# Altium PCB PAY-IF_R100.PcbDoc (part 4 of 5)
Units mm, origin at the board's own origin, x right, y up, seen from the top; angles counter-clockwise.
Board outline 93 x 90 mm, 6 copper layers (Top Layer, L2_GND, L3_PWR, L4_SIG, L5_GND, Bottom Layer), stack 1.598 mm thick; 271 components, 237 nets, 1362 pads, 661 vias.
Unrouted connection lines stored in the file: 5.
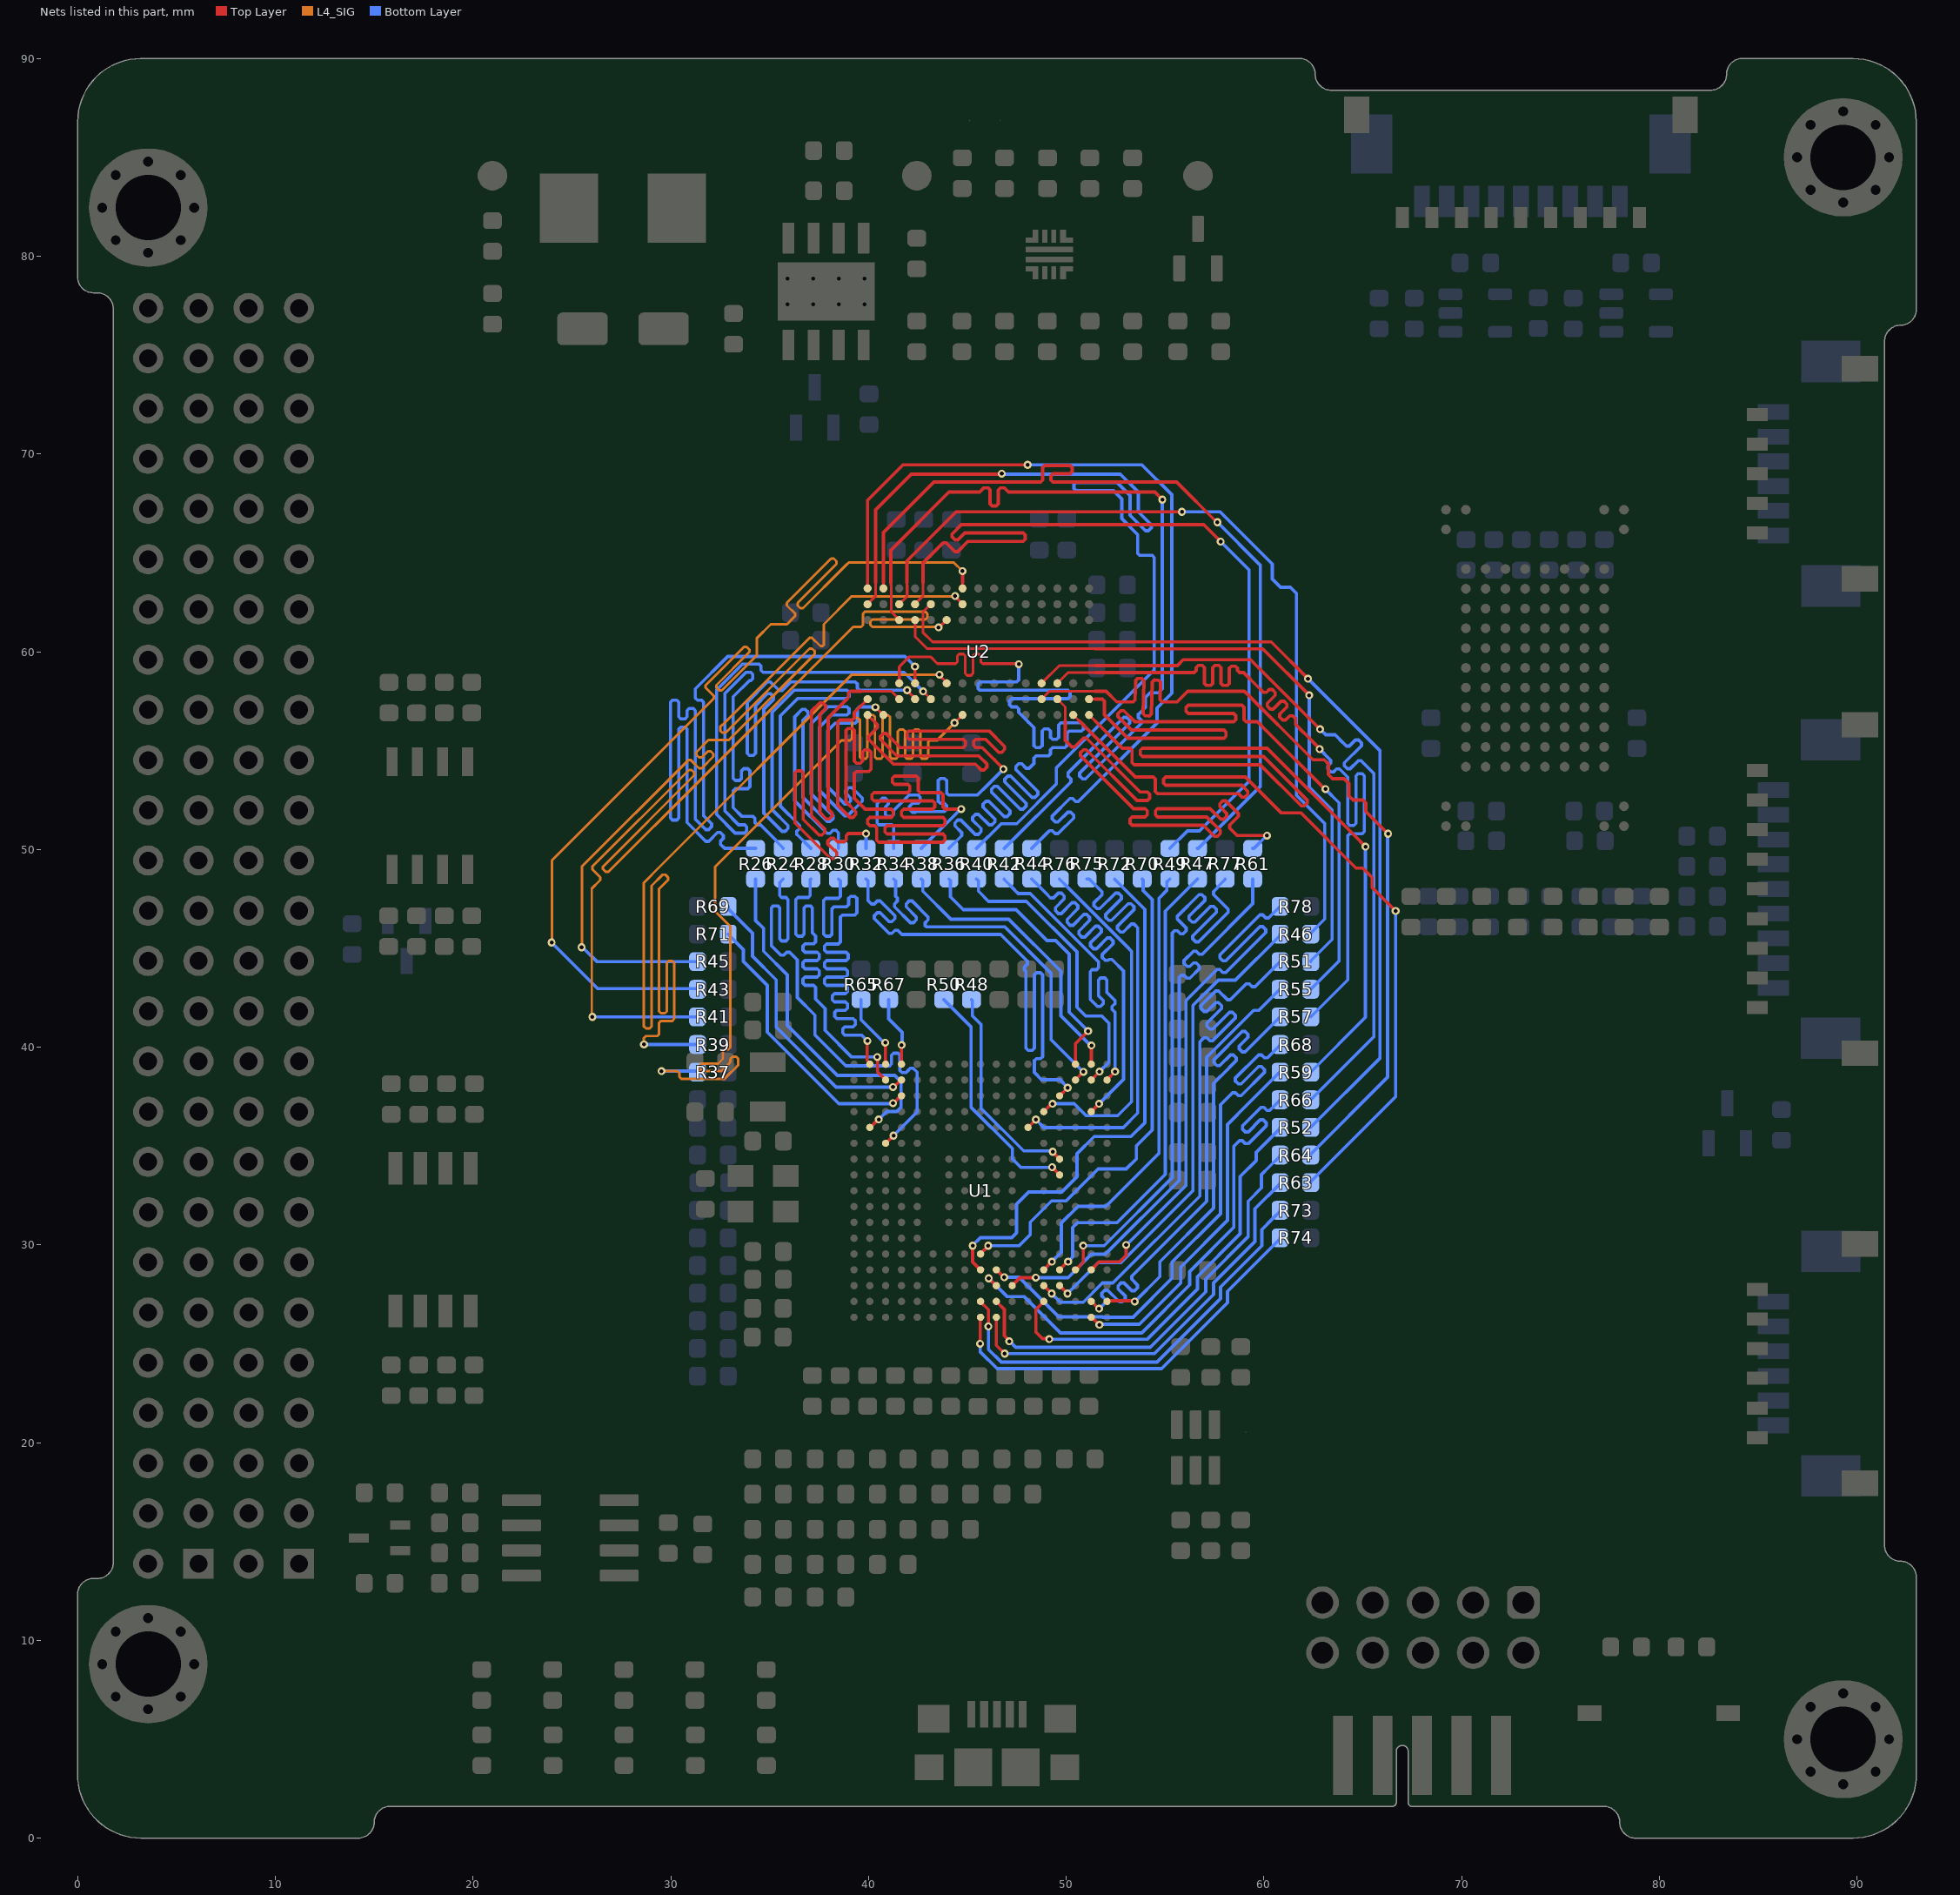
[diagram p8: the nets of this part, all layers, seen from the top]

## Via types
v1: diameter 0.4, hole 0.2, Top Layer to Bottom Layer, tented both sides, 661 vias

## Nets (pads, with @x,y where several pads share a name; then routed paths per layer and width w, separated by ;. In a path a pad name is that pad's centre, name@x,y a point inside that pad or via, vN(x,y) a via of type N, cw(c..) or ccw(c..) an arc to the next point about the centre after c; other vN are vias at no path point) (continued)
SDRAM_B_D9: R66.1 U2.M3 | length 40
  Top Layer w0.14: U2.M3@48.757,58.401 49.654,59.298 51.457,59.298
  Top Layer w0.165: 51.457,59.298 55.627,59.298 55.923,59.594 59.329,59.594 v1(62.845,56.078)
  Bottom Layer w0.165: R66.1@62.37,37.338 65.563,40.531 65.563,53.838 64.976,54.426 64.917,54.484 64.769,54.484 64.369,54.084 64.221,54.084 64.072,54.232 64.072,54.38 64.932,55.24 64.932,55.388 64.784,55.536 64.635,55.536 64.325,55.225 64.176,55.225 63.864,55.537 63.806,55.596 63.608,55.794 63.13,55.794 v1(62.845,56.078)
SDRAM_B_D10: R64.1 U2.M2 | length 45.5
  Top Layer w0.135: U2.M2@48.757,57.601 49.154,57.999 51.457,57.999
  Top Layer w0.165: 51.457,57.999 52.02,57.999 52.56,57.459 53.299,57.459 53.381,57.459 53.489,57.561 53.517,58.55 53.625,58.651 53.834,58.645 53.936,58.538 53.888,56.863 53.99,56.756 54.199,56.75 54.307,56.851 54.353,58.468 54.461,58.569 54.67,58.563 54.772,58.456 54.747,57.567 54.848,57.459 55.605,57.459 56.146,58 59.013,58 62.482,54.531 63.053,54.531 63.264,54.32 63.264,53.786 63.472,53.578 64.061,53.578 64.302,53.337 64.302,52.712 64.513,52.501 65.017,52.501 65.159,52.359 65.159,51.919 v1(66.285,50.792)
  Bottom Layer w0.165: R64.1@62.37,34.544 62.37,34.594 66.257,38.481 66.257,50.765 v1(66.285,50.792)
SDRAM_B_D11: R63.1 U2.P1 | length 46.2
  Top Layer w0.14: U2.P1@50.357,56.801 50.657,56.501
  Top Layer w0.165: 53.497,53.661 54.324,53.661 54.407,53.661 54.511,53.556 54.511,52.928 54.616,52.823 58.712,52.823 58.889,52.646 59.038,52.646 59.186,52.794 59.186,52.942 58.886,53.242 55.035,53.242 54.93,53.347 54.93,53.556 55.035,53.661 59.06,53.661 60.866,51.855 61.739,51.855 61.868,51.855 64.666,49.057 65.004,49.057 65.473,48.587 65.473,48.081 v1(66.666,46.889)
  Top Layer w0.166: 50.657,56.501 53.497,53.661
  Bottom Layer w0.165: R63.1@62.37,33.147 62.37,33.197 66.666,37.493 v1(66.666,46.889)
SDRAM_B_D12: R61.1 U2.N2 | length 37.7
  Top Layer w0.135: U2.N2@49.557,57.601 49.954,57.204 49.954,56.501
  Top Layer w0.165: 49.953,55.955 49.953,55.665 49.953,55.515 50.28,55.188 50.428,55.188 50.873,55.632 51.021,55.632 53.753,52.901 54.118,52.901 54.223,52.796 54.223,52.586 54.118,52.482 53.579,52.482 51.021,55.04 50.873,55.04 50.725,54.892 50.725,54.744 53.406,52.063 53.996,52.063 54.1,51.958 54.1,51.748 53.996,51.644 53.337,51.644 53.232,51.539 53.232,51.329 53.337,51.225 56.937,51.225 57.501,50.661 57.649,50.661 57.797,50.809 57.797,50.957 57.111,51.644 54.624,51.644 54.519,51.748 54.519,51.958 54.624,52.063 57.284,52.063 57.822,51.525 57.97,51.525 58.118,51.673 58.118,51.822 57.777,52.163 57.777,52.311 57.925,52.459 58.073,52.459 58.71,51.822 58.71,51.673 58.266,51.229 58.266,51.081 58.324,51.023 58.644,50.703 v1(60.159,50.703) ; 49.954,55.956 49.954,56.501
  Bottom Layer w0.165: R61.1@59.436,50.051 59.496,50.051 60.148,50.703 v1(60.159,50.703)
SDRAM_B_D13: R59.1 U2.R1 | length 49.2
  Top Layer w0.14: U2.R1@51.157,56.801 51.457,56.501
  Top Layer w0.165: 51.457,56.501 52.84,55.118 53.146,55.118 53.228,55.118 53.333,55.013 53.333,54.385 53.438,54.28 59.816,54.28 61.897,52.2 62.045,52.2 62.193,52.348 62.193,52.496 59.99,54.699 53.857,54.699 53.752,54.804 53.752,55.013 53.857,55.118 60.164,55.118 64.579,50.703 v1(65.14,50.141)
  Bottom Layer w0.165: R59.1@62.37,38.735 65.14,41.505 v1(65.14,50.141)
SDRAM_B_D14: R57.1 U2.N3 | length 43.8
  Top Layer w0.14: U2.N3@49.557,58.401 50.1,58.944 51.457,58.944
  Top Layer w0.165: 51.457,58.944 51.93,58.944 56.388,58.944 56.471,58.944 56.575,59.049 56.575,59.199 56.68,59.304 56.89,59.304 56.994,59.199 56.994,58.395 57.099,58.29 57.309,58.29 57.413,58.395 57.413,59.199 57.518,59.304 57.728,59.304 57.832,59.199 57.832,58.395 57.937,58.29 58.147,58.29 58.251,58.395 58.251,59.162 58.356,59.267 58.566,59.267 58.67,59.162 58.67,59.049 58.775,58.944 58.977,58.944 59.711,58.211 59.921,58 59.98,57.942 60.128,57.942 60.275,58.09 60.424,58.09 60.572,57.941 60.572,57.793 60.175,57.397 60.175,57.249 60.323,57.1 60.471,57.1 60.868,57.497 61.016,57.497 61.164,57.349 61.164,57.201 60.804,56.841 60.804,56.692 60.952,56.544 61.1,56.544 61.313,56.757 61.461,56.757 61.609,56.609 61.609,56.461 61.609,56.313 61.992,55.93 62.05,55.872 62.822,55.1 v1(62.822,55.073)
  Bottom Layer w0.165: R57.1@62.37,41.529 64.242,43.401 64.242,50.19 64.242,50.692 64.347,50.797 64.976,50.797 65.08,50.901 65.08,53.721 64.976,53.826 64.766,53.826 64.661,53.721 64.661,51.32 64.557,51.216 64.347,51.216 64.242,51.32 64.242,53.652 63.824,54.07 63.676,54.07 63.528,53.922 63.38,53.922 63.232,54.07 63.232,54.218 63.38,54.367 63.38,54.515 63.321,54.573 v1(62.822,55.073)
SDRAM_B_D15: R55.1 U2.R2 | length 43.9
  Top Layer w0.14: U2.R2@51.157,57.601 51.457,57.601
  Top Layer w0.165: 51.742,57.601 51.825,57.601 51.93,57.497 51.93,56.815 52.019,56.726 53.126,55.619 57.979,55.619 58.083,55.723 58.083,55.933 57.979,56.038 53.299,56.038 52.617,56.72 52.617,56.868 52.765,57.017 52.913,57.017 53.473,56.457 58.474,56.457 58.578,56.561 58.578,56.771 58.474,56.876 56.169,56.876 56.064,56.98 56.064,57.19 56.169,57.295 58.893,57.295 58.997,57.19 58.997,56.561 59.102,56.457 59.672,56.457 60.125,56.004 60.257,55.872 v1@63.107,53.022
  Top Layer w0.166: 51.457,57.601 51.742,57.601
  Bottom Layer w0.165: R55.1@62.37,42.926 63.806,44.362 63.806,52.357 v1(63.112,53.051)
SDRAM_B_D16: R52.1 U2.E8 | length 47.7
  Top Layer w0.138: 42.757,60.979 42.757,62.002
  Top Layer w0.14: 42.757,60.979 43.243,60.492 51.457,60.492 ; 42.757,62.002 U2.E8@43.157,62.401
  Top Layer w0.165: 51.457,60.492 60.37,60.492 v1(62.23,58.633)
  Bottom Layer w0.165: v1(62.23,58.633) 65.878,54.985 65.878,39.455 62.37,35.947 R52.1@62.37,35.941
SDRAM_B_D17: R51.1 U2.D7 | length 36.4
  Top Layer w0.14: U2.D7@42.357,61.601 42.357,60.772 42.981,60.148 51.457,60.148
  Top Layer w0.165: 59.946,60.148 v1(62.295,57.8)
  Top Layer w0.166: 51.457,60.148 59.946,60.148
  Bottom Layer w0.165: v1(62.295,57.8) 62.295,53.148 63.448,51.995 63.448,45.451 62.37,44.373 R51.1@62.37,44.323
SDRAM_B_D18: R49.1 U2.D8 | length 44.9
  Top Layer w0.14: U2.D8@42.357,62.401 42.757,62.801 42.757,63.5
  Top Layer w0.165: 42.757,63.5 42.757,64.484 43.725,65.453 43.783,65.511 43.932,65.511 44.376,65.067 44.524,65.067 45.041,65.583 47.829,65.583 47.933,65.688 47.933,65.897 47.829,66.002 44.867,66.002 44.524,65.659 44.376,65.659 44.228,65.807 44.228,65.955 44.693,66.421 48.185,66.421 48.373,66.421 56.962,66.421 v1(57.817,65.566)
  Bottom Layer w0.165: R49.1@55.245,50.051 56.134,50.94 56.742,50.94 59.248,53.446 59.248,64.134 v1(57.817,65.566)
SDRAM_B_D19: R47.1 U2.B9 | length 43.8
  Top Layer w0.14: U2.B9@40.757,63.201 40.757,63.5
  Top Layer w0.165: 40.757,63.5 40.757,66.03 43.307,68.58 48.62,68.58 48.703,68.58 48.807,68.685 48.807,69.313 48.912,69.418 50.2,69.418 50.305,69.313 50.305,69.104 50.2,68.999 49.331,68.999 49.226,68.894 49.226,68.685 49.331,68.58 53.098,68.58 55.586,68.58 57.619,66.547 v1(57.652,66.547)
  Bottom Layer w0.165: R47.1@56.642,50.051 56.692,50.051 59.817,53.176 59.817,64.382 v1(57.652,66.547)
SDRAM_B_D20: R46.1 U2.C8 | length 43.4
  Top Layer w0.14: U2.C8@41.562,62.401 41.957,62.796 41.957,63.367 41.942,63.382 41.942,63.5
  Top Layer w0.165: 41.942,63.5 41.942,64.589 44.427,67.075 v1(55.859,67.075)
  Bottom Layer w0.165: v1(55.859,67.075) 57.784,67.075 60.423,64.435 60.423,63.679 60.841,63.261 61.337,63.261 61.65,62.948 61.65,52.738 63.08,51.308 63.08,48.553 63.08,46.48 62.37,45.77 R46.1@62.37,45.72
SDRAM_B_D21: R44.1 U2.A9 | length 45
  Top Layer w0.14: U2.A9@39.957,63.201 39.957,63.5
  Top Layer w0.165: 39.957,63.5 39.957,67.663 41.746,69.452 v1(48.049,69.452)
  Bottom Layer w0.165: v1(48.049,69.452) 53.83,69.452 55.344,67.938 55.344,57.899 54.598,57.153 54.598,56.397 50.685,52.483 50.626,52.425 50.478,52.425 50.33,52.573 50.182,52.573 49.297,51.688 49.297,51.54 49.445,51.392 49.593,51.392 50.084,51.882 50.232,51.882 50.38,51.734 50.38,51.586 49.593,50.799 49.445,50.799 49.297,50.948 49.149,50.948 49.091,50.889 48.26,50.059 R44.1@48.26,50.051
SDRAM_B_D22: R42.1 U2.C7 | length 50.5
  Top Layer w0.14: 41.127,63.5 41.127,63.397 41.157,63.367 41.157,62.001 U2.C7@41.557,61.601
  Top Layer w0.165: 41.127,63.5 41.127,65.13 44.069,68.072 45.543,68.072 45.626,68.072 45.731,68.177 45.731,68.185 45.835,68.29 46.045,68.29 46.15,68.185 46.15,67.481 46.254,67.376 46.464,67.376 46.569,67.481 46.569,68.177 46.673,68.282 46.883,68.282 46.988,68.177 ; 46.988,68.177 47.092,68.072 48.233,68.072 54.483,68.072 v1(54.864,67.691)
  Bottom Layer w0.165: R42.1@46.863,50.051 46.876,50.051 50.182,53.357 50.24,53.415 50.24,53.563 50.092,53.712 50.092,53.86 52.912,56.68 53.06,56.68 53.209,56.532 53.209,56.384 50.685,53.86 50.685,53.712 50.833,53.563 50.981,53.563 53.801,56.384 53.801,56.532 53.653,56.68 53.653,56.828 53.711,56.886 54.011,57.186 54.011,57.696 54.238,57.923 54.666,57.923 54.864,58.121 54.864,62.918 v1(54.864,67.691)
SDRAM_B_D23: R40.1 U2.A8 | length 52.8
  Top Layer w0.14: U2.A8@39.957,62.401 40.358,62.802 40.358,63.035 40.357,63.036 40.357,63.367 40.358,63.368 40.358,63.5
  Top Layer w0.165: 40.358,63.5 40.358,67.178 42.162,68.982 46.719,68.982 v1(46.742,69.006)
  Bottom Layer w0.165: R40.1@45.466,50.051 46.714,51.299 47.499,51.299 49.507,53.308 49.507,54.126 54.455,59.073 54.455,64.685 54.455,64.768 54.35,64.872 53.722,64.872 53.617,64.977 53.617,65.921 52.81,66.728 52.81,67.727 52.393,68.144 50.499,68.144 50.394,68.249 50.394,68.458 50.499,68.563 52.566,68.563 53.229,67.9 53.229,66.901 54.013,66.117 54.161,66.117 54.309,66.265 54.309,66.413 53.648,67.075 53.648,68.074 52.74,68.982 47.117,68.982 46.766,68.982 v1(46.742,69.006)
SDRAM_B_D24: R38.1 U2.A2 | length 53.4
  Top Layer w0.14: 39.624,57.269 U2.A2@39.957,57.601
  Top Layer w0.165: 39.624,57.269 39.287,56.932 39.287,56.729 39.287,56.646 39.183,56.542 38.554,56.542 38.449,56.437 38.449,52.234 39.064,51.62 39.212,51.62 39.36,51.768 39.36,51.916 38.868,52.408 38.868,56.018 38.973,56.123 39.183,56.123 39.287,56.018 39.287,54.465 39.392,54.36 39.602,54.36 39.706,54.465 39.706,54.933 39.811,55.037 40.021,55.037 40.125,54.933 40.125,54.046 40.021,53.941 39.392,53.941 39.287,53.837 39.287,52.581 39.832,52.037 41.151,52.037 41.255,51.932 41.255,51.723 41.151,51.618 40.065,51.618 39.96,51.513 39.96,51.304 40.065,51.199 40.313,51.199 40.417,51.094 40.417,50.466 40.522,50.361 43.769,50.361 43.874,50.466 43.874,50.675 43.769,50.78 40.941,50.78 40.836,50.885 40.836,51.094 40.941,51.199 43.769,51.199 43.874,51.304 43.874,51.513 43.769,51.618 41.779,51.618 41.674,51.723 41.674,51.932 41.779,52.037 43.246,52.037 43.35,52.142 43.35,52.351 43.246,52.456 40.283,52.456 40.179,52.561 40.179,52.77 40.283,52.875 41.989,52.875 42.093,52.98 42.093,53.189 41.989,53.294 41.316,53.294 41.211,53.399 41.211,53.608 41.316,53.713 42.408,53.713 42.512,53.608 42.512,52.98 42.617,52.875 43.665,52.875 43.769,52.77 43.769,52.142 43.874,52.037 43.957,52.037 v1(44.69,52.038) v1(44.69,52.038)
  Bottom Layer w0.165: R38.1@42.672,50.051 44.659,52.038 v1(44.69,52.038)
SDRAM_B_D25: R36.1 U2.C3 | length 52.6
  Top Layer w0.14: U2.C3@41.557,58.401 41.557,59.237 42.063,59.743 43.138,59.743 43.487,59.393 44.33,59.393 44.4,59.393 44.498,59.492 44.498,59.785 44.597,59.883 44.794,59.883 44.892,59.785 44.892,58.9 44.991,58.801 45.188,58.801 45.286,58.9 45.286,59.785 45.385,59.883 45.582,59.883 45.68,59.785 45.68,59.492 45.779,59.393 46.336,59.393 47.575,59.393 v1(47.604,59.365)
  Bottom Layer w0.165: R36.1@44.069,50.051 44.659,50.642 44.718,50.7 44.718,50.848 44.372,51.193 44.372,51.341 44.521,51.489 44.669,51.489 45.401,50.758 45.549,50.758 45.697,50.906 45.697,51.054 45.271,51.48 45.271,51.628 45.419,51.776 45.567,51.776 46.1,51.243 46.248,51.243 46.396,51.391 46.396,51.54 45.798,52.138 45.798,52.286 45.946,52.435 46.094,52.435 46.865,51.663 47.013,51.663 47.161,51.811 47.161,51.96 46.223,52.898 46.223,53.047 46.371,53.195 46.519,53.195 47.677,52.036 47.825,52.036 47.974,52.184 47.974,52.332 46.898,53.408 46.898,53.556 47.046,53.704 47.194,53.704 48.27,52.629 48.418,52.629 48.566,52.777 48.566,52.925 47.453,54.039 47.453,54.187 47.601,54.335 47.749,54.335 47.977,54.107 48.125,54.107 48.193,54.175 48.368,54.35 48.368,54.54 48.368,54.622 48.472,54.727 49.101,54.727 49.206,54.832 49.206,55.041 49.31,55.146 49.939,55.146 50.044,55.251 50.044,55.879 50.148,55.984 50.777,55.984 50.882,56.089 50.882,56.298 50.777,56.403 49.729,56.403 49.625,56.298 49.625,55.67 49.52,55.565 49.31,55.565 49.206,55.67 49.206,55.989 49.101,56.093 48.891,56.093 48.787,55.989 48.787,55.251 48.682,55.146 48.472,55.146 48.368,55.251 48.368,56.164 48.163,56.369 48.089,56.443 48.031,56.501 47.604,56.928 47.604,57.024 47.604,57.106 47.5,57.211 47.247,57.211 47.142,57.316 47.142,57.525 47.247,57.63 50.095,57.63 50.199,57.735 50.199,57.944 50.095,58.049 45.643,58.049 45.538,58.154 45.538,58.363 45.643,58.468 47.5,58.468 47.604,58.573 47.604,58.985 v1(47.604,59.365)
SDRAM_B_D26: R34.1 U2.A1 | length 48.5
  Top Layer w0.165: U2.A1@39.957,56.801 40.391,56.367 40.449,56.309 40.449,56.161 40.005,55.716 40.005,55.568 41.258,54.315 45.409,54.315 45.702,54.022 45.85,54.022 45.998,54.17 45.998,54.318 45.582,54.734 41.432,54.734 40.598,55.568 40.598,55.716 40.746,55.864 40.894,55.864 41.606,55.153 44.8,55.153 44.905,55.257 44.905,55.467 44.8,55.572 42.057,55.572 41.953,55.676 41.953,55.886 42.057,55.991 46.103,55.991 46.887,55.207 46.887,55.059 46.738,54.911 46.59,54.911 45.93,55.572 45.428,55.572 45.324,55.467 45.324,55.257 45.428,55.153 45.756,55.153 46.22,54.689 46.294,54.615 46.368,54.54 46.426,54.482 46.826,54.083 v1(46.826,54.06)
  Bottom Layer w0.165: R34.1@41.275,50.051 41.275,51.054 41.275,51.136 41.17,51.241 40.542,51.241 40.437,51.346 40.437,52.314 40.706,52.583 40.854,52.583 41.002,52.435 41.002,52.286 40.856,52.141 40.856,51.765 40.961,51.66 41.17,51.66 41.275,51.765 41.275,51.967 42.058,52.75 42.514,52.75 42.619,52.645 42.619,52.436 42.514,52.331 42.231,52.331 42.08,52.179 42.08,52.031 42.228,51.883 42.376,51.883 42.405,51.912 43.849,51.912 43.953,52.017 43.953,52.226 43.849,52.331 43.639,52.331 43.534,52.436 43.534,53.483 43.639,53.588 43.849,53.588 43.953,53.483 43.953,52.855 44.058,52.75 45.516,52.75 46.038,53.273 46.171,53.405 v1(46.826,54.06)
SDRAM_B_D27: R32.1 U2.C2 | length 37.1
  Top Layer w0.14: 39.624,58 39.79,58 39.791,58.001 40.922,58.001 40.923,58 41.158,58 U2.C2@41.557,57.601
  Top Layer w0.165: 39.172,58.01 39.089,58.01 38.984,57.905 38.984,57.682 38.883,57.582 37.959,56.657 37.959,52.041 38.164,51.837 38.164,51.689 38.016,51.541 37.867,51.541 37.54,51.868 37.54,56.831 37.829,57.12 37.829,57.268 37.681,57.416 37.533,57.416 37.121,57.004 37.121,51.694 37.794,51.021 37.794,50.873 37.646,50.725 37.498,50.725 36.702,51.521 36.702,53.871 36.597,53.976 36.388,53.976 36.283,53.871 36.283,51.347 38.087,49.543 38.291,49.543 38.396,49.648 38.396,49.857 38.291,49.962 38.261,49.962 37.942,50.281 37.942,50.429 38.09,50.577 38.239,50.577 38.434,50.381 38.772,50.381 38.876,50.486 38.876,50.695 38.981,50.8 39.064,50.8 v1(39.878,50.8) ; 39.181,58 39.624,58
  Bottom Layer w0.165: R32.1@39.878,50.051 v1(39.878,50.8)
SDRAM_B_D28: R30.1 U2.B1 | length 41.3
  Top Layer w0.14: v1(40.35,57.187) 40.361,57.187 40.746,56.801 U2.B1@40.757,56.801
  Bottom Layer w0.165: R30.1@38.481,50.051 38.481,50.842 38.416,50.908 38.357,50.966 38.209,50.966 38.061,50.818 37.913,50.818 36.271,52.46 36.271,56.706 36.65,57.085 36.798,57.085 36.946,56.936 36.946,56.788 36.69,56.532 36.69,52.634 37.913,51.41 38.061,51.41 38.209,51.559 38.209,51.707 37.109,52.807 37.109,56.358 37.969,57.218 38.913,57.218 39.018,57.114 39.018,56.904 38.913,56.799 38.142,56.799 37.528,56.185 37.528,52.981 38.802,51.707 38.95,51.707 39.69,52.447 39.69,52.596 39.158,53.128 39.009,53.128 38.861,52.98 38.861,52.832 39.098,52.596 39.098,52.447 38.95,52.299 38.802,52.299 37.947,53.154 37.947,56.011 38.316,56.38 39.332,56.38 39.437,56.485 39.437,57.105 39.541,57.21 39.624,57.21 40.327,57.21 v1(40.35,57.187)
SDRAM_B_D29: R28.1 U2.D2 | length 46.4
  Top Layer w0.14: v1(41.957,58.054) 41.957,58.028 42.357,57.628 U2.D2@42.357,57.601
  Bottom Layer w0.165: R28.1@37.079,50.056 36.43,50.705 36.372,50.763 36.372,50.912 36.52,51.06 36.52,51.208 35.542,52.185 35.542,56.756 36.421,57.635 38.913,57.635 39.018,57.74 39.018,57.949 38.913,58.054 36.247,58.054 35.123,56.93 35.123,52.012 35.927,51.208 35.927,51.06 35.779,50.912 35.631,50.912 34.704,51.838 34.704,57.103 35.188,57.587 35.188,57.735 35.04,57.883 34.892,57.883 34.285,57.277 34.285,54.862 34.18,54.757 33.971,54.757 33.866,54.862 33.866,57.45 34.892,58.476 35.04,58.476 35.484,58.031 35.632,58.031 36.074,58.473 39.332,58.473 39.437,58.368 39.437,58.159 39.541,58.054 39.624,58.054 v1(41.957,58.054)
SDRAM_B_D30: R26.1 U2.D3 | length 50.4
  Top Layer w0.14: v1(42.354,59.251) v1(42.354,59.251) 42.355,58.403 U2.D3@42.357,58.401
  Bottom Layer w0.165: R26.1@34.29,50.051 32.984,50.051 32.728,50.051 32.513,50.265 32.513,50.413 32.662,50.562 32.662,50.71 32.513,50.858 32.365,50.858 31.921,50.413 31.773,50.413 30.825,51.361 30.825,56.082 30.72,56.187 30.51,56.187 30.406,56.082 30.406,51.59 30.301,51.485 30.091,51.485 29.987,51.59 29.987,57.443 30.091,57.548 30.301,57.548 30.406,57.443 30.406,56.711 30.51,56.606 30.72,56.606 30.825,56.711 30.825,57.024 30.929,57.129 31.139,57.129 31.244,57.024 31.244,51.535 31.773,51.006 31.921,51.006 32.069,51.154 32.069,51.302 31.663,51.708 31.663,57.443 31.558,57.548 31.348,57.548 31.244,57.653 31.244,57.735 31.244,58.12 32.88,59.756 41.849,59.756 v1(42.354,59.251)
SDRAM_B_D31: R24.1 U2.E2 | length 43.2
  Top Layer w0.14: v1(42.766,57.993) U2.E2@43.157,57.601
  Bottom Layer w0.165: R24.1@35.687,50.051 35.687,50.071 35.316,50.442 35.316,50.476 34.542,51.25 34.448,51.25 34.366,51.25 34.261,51.355 34.261,51.564 34.156,51.669 33.607,51.669 33.161,52.116 33.161,52.966 33.265,53.071 33.894,53.071 33.999,53.176 33.999,53.979 33.894,54.083 33.684,54.083 33.58,53.979 33.58,53.595 33.475,53.49 33.265,53.49 33.161,53.595 33.161,57.72 33.978,58.537 34.044,58.537 34.149,58.642 34.149,58.851 34.044,58.956 33.805,58.956 32.742,57.893 32.742,51.942 33.434,51.25 33.737,51.25 33.842,51.145 33.842,50.936 33.737,50.831 33.26,50.831 32.323,51.769 32.323,58.067 33.631,59.375 34.463,59.375 34.568,59.27 34.568,59.061 34.672,58.956 34.755,58.956 39.619,58.956 39.624,58.952 41.807,58.952 v1(42.766,57.993)
SDRAM_BA0: R50.1 U1.H14 | length 12.2
  Top Layer w0.165: v1(49.288,33.929) 49.288,33.924 49.669,33.543 U1.H14@49.669,33.539
  Bottom Layer w0.165: R50.1@43.815,42.405 45.186,41.034 45.186,36.971 47.28,34.877 47.28,34.351 47.712,33.918 v1@49.277,33.918
SDRAM_BA1: R48.1 U1.G14 | length 10.7
  Top Layer w0.165: v1(49.321,34.709) 49.321,34.698 49.669,34.35 U1.G14@49.669,34.339
  Bottom Layer w0.165: R48.1@45.212,42.405 45.258,42.359 45.258,41.588 45.698,41.148 45.698,36.905 47.851,34.752 49.278,34.752 v1(49.321,34.709)
SDRAM_D0: R78.2 U1.P16 | length 29.4
  Top Layer w0.165: U1.P16@51.269,28.739 51.672,29.142 52.704,29.142 53.032,29.47 53.032,29.997 v1(53.035,30)
  Bottom Layer w0.165: v1(53.035,30) 53.058,30 56.063,33.005 56.063,42.36 57.57,43.867 57.628,43.925 57.776,43.925 57.924,43.777 58.072,43.777 60.095,45.8 60.095,45.948 59.947,46.096 59.799,46.096 58.072,44.369 57.924,44.369 57.776,44.518 57.776,44.666 59.799,46.688 59.947,46.688 60.095,46.54 60.243,46.54 60.302,46.599 R78.2@60.82,47.117
SDRAM_D1: R77.2 U1.P15 | length 33.3
  Top Layer w0.165: U1.P15@50.486,28.739 50.866,29.119 50.866,29.959 v1(50.863,29.962)
  Bottom Layer w0.165: v1(50.863,29.962) 51.927,29.962 55.365,33.4 55.365,45.035 55.365,45.327 55.365,45.772 55.477,45.884 55.625,45.884 55.773,45.735 55.921,45.735 56.069,45.884 56.069,46.032 55.625,46.476 55.625,46.624 56.715,47.715 56.863,47.715 57.011,47.567 57.011,47.418 56.217,46.624 56.217,46.476 56.366,46.328 56.514,46.328 57.308,47.122 57.456,47.122 57.604,46.974 57.604,46.826 56.4,45.622 56.4,45.474 56.548,45.326 56.696,45.326 58.197,46.826 58.197,46.974 57.752,47.418 57.678,47.493 57.456,47.715 57.456,47.863 57.514,47.921 57.669,48.076 57.669,48.11 58.039,48.481 R77.2@58.039,48.501
SDRAM_D2: R76.2 U1.D13 | length 17.9
  Top Layer w0.165: U1.D13@48.869,36.739 v1@49.269,37.139
  Bottom Layer w0.165: v1(49.308,37.139) 50.401,37.139 51.007,36.533 52.604,36.533 53.31,37.239 53.31,44.848 53.077,45.081 50.129,48.029 R76.2@49.657,48.501
SDRAM_D3: R75.2 U1.E12 | length 25.4
  Top Layer w0.165: U1.E12@48.069,35.939 v1(48.469,36.339)
  Bottom Layer w0.165: v1(48.469,36.339) 48.877,35.931 52.888,35.931 53.622,36.665 53.622,46.041 53.499,46.165 53.44,46.223 53.292,46.223 52.893,45.824 52.745,45.824 52.596,45.972 52.596,46.12 53.431,46.955 53.431,47.103 53.283,47.251 53.135,47.251 52.3,46.416 52.152,46.416 52.004,46.564 52.004,46.712 52.79,47.498 52.79,47.646 52.641,47.794 52.493,47.794 51.708,47.009 51.559,47.009 51.411,47.157 51.411,47.305 51.811,47.704 51.811,47.852 51.79,47.873 51.732,47.931 51.162,48.501 R75.2@51.054,48.501
SDRAM_D4: R74.2 U1.U9 | length 20.4
  Top Layer w0.165: v1(45.648,25.002) 45.654,25.008 45.654,26.319 U1.U9@45.669,26.334
  Bottom Layer w0.165: v1(45.648,25.002) 45.648,24.599 46.509,23.738 54.826,23.738 58.166,27.078 58.166,27.649 60.81,30.293 60.82,30.293 R74.2@60.82,30.353
SDRAM_D5: R73.2 U1.T9 | length 21.6
  Top Layer w0.165: U1.T9@45.669,27.139 45.669,27.123 46.067,26.725 46.067,25.883 v1(46.062,25.877)
  Bottom Layer w0.165: v1(46.062,25.877) 46.069,25.87 46.069,24.717 46.714,24.072 54.599,24.072 57.806,27.279 57.806,27.868 59.894,29.955 59.894,30.774 60.473,31.353 60.82,31.7 R73.2@60.82,31.75
SDRAM_D6: R72.2 U1.P9 | length 27.2
  Top Layer w0.165: v1(45.269,29.96) 45.269,29.139 U1.P9@45.669,28.739
  Bottom Layer w0.165: v1(45.269,29.96) 45.269,29.979 45.659,30.369 45.912,30.369 ; 45.913,30.368 47.064,30.368 ; 47.065,30.369 47.25,30.369 47.494,30.613 47.494,32.063 48.111,32.68 49.784,32.68 50.549,33.445 50.549,34.615 51.414,35.48 53.279,35.48 53.979,36.18 53.979,46.965 52.451,48.493 R72.2@52.451,48.501
SDRAM_D7: R70.2 U1.N9 | length 25
  Top Layer w0.165: U1.N9@45.669,29.539 45.669,29.556 46.055,29.942 v1(46.055,29.959)
  Bottom Layer w0.165: v1(46.055,29.959) 47.625,29.959 48.181,30.514 48.181,31.148 49.261,32.229 50.002,32.229 51.611,33.838 53.041,33.838 53.555,34.352 53.555,35.013 54.356,35.814 54.356,47.461 53.896,47.921 53.896,48.453 R70.2@53.848,48.501
SDRAM_D8: R68.2 U1.P10 | length 28.9
  Top Layer w0.165: U1.P10@46.469,28.739 46.479,28.739 46.855,28.363 v1(46.865,28.363)
  Bottom Layer w0.165: v1(46.865,28.363) 47.62,28.363 49.619,26.364 51.85,26.364 51.872,26.343 53.383,26.343 55.358,28.318 55.358,29.132 57.806,31.58 57.806,37.091 58.354,37.638 58.412,37.696 58.56,37.696 58.708,37.548 58.856,37.548 60.03,38.722 60.03,38.87 59.882,39.018 59.734,39.018 58.856,38.141 58.708,38.141 58.56,38.289 58.56,38.437 59.734,39.611 59.882,39.611 60.03,39.463 60.179,39.463 60.237,39.521 60.82,40.104 R68.2@60.82,40.132
SDRAM_D9: R66.2 U1.R10 | length 27.4
  Top Layer w0.165: v1(46.081,28.307) 46.091,28.307 46.459,27.939 U1.R10@46.469,27.939 U1.R10@46.469,27.933
  Bottom Layer w0.165: v1(46.081,28.307) 47,27.389 47.867,27.389 49.706,25.549 53.82,25.549 56.248,27.976 56.248,28.655 58.481,30.888 58.481,34.986 58.708,35.213 58.767,35.272 58.915,35.272 59.063,35.124 59.211,35.124 60.113,36.026 60.113,36.174 59.965,36.322 59.817,36.322 59.211,35.716 59.063,35.716 58.915,35.864 58.915,36.012 59.855,36.953 60.003,36.953 60.151,36.804 60.299,36.804 60.358,36.863 60.82,37.325 R66.2@60.82,37.338
SDRAM_D10: R64.2 U1.T10 | length 22
  Top Layer w0.165: U1.T10@46.469,27.139 46.869,26.739 46.869,25.402 47.122,25.149 v1(47.122,25.124)
  Bottom Layer w0.165: v1(47.122,25.124) 47.15,25.124 47.452,24.822 54.26,24.822 57.059,27.622 57.059,28.268 59.201,30.41 59.201,32.204 59.224,32.226 59.879,32.881 59.879,33.553 60.266,33.94 60.82,34.494 R64.2@60.82,34.544
SDRAM_D11: R63.2 U1.U10 | length 20.9
  Top Layer w0.165: U1.U10@46.469,26.339 46.469,24.922 46.891,24.501 v1(46.893,24.501)
  Bottom Layer w0.165: v1(46.893,24.501) 54.461,24.501 57.458,27.497 57.458,28.072 59.55,30.164 59.55,31.827 60.82,33.097 R63.2@60.82,33.147
SDRAM_D12: R61.2 U1.R11 | length 29.5
  Top Layer w0.165: U1.R11@47.269,27.939 47.668,28.338 v1@48.454,28.338
  Bottom Layer w0.165: v1(48.46,28.344) 50.096,28.344 51.276,29.524 51.983,29.524 55.714,33.255 55.714,43.534 55.758,43.578 55.817,43.637 55.965,43.637 56.113,43.489 56.261,43.489 56.732,43.959 56.732,44.107 56.584,44.256 56.435,44.256 56.261,44.081 56.113,44.081 55.965,44.229 55.965,44.377 56.435,44.848 56.584,44.848 56.732,44.7 56.88,44.7 56.938,44.758 59.436,47.256 R61.2@59.436,48.501
SDRAM_D13: R59.2 U1.U16 | length 18.3
  Top Layer w0.165: U1.U16@51.269,26.339 51.299,26.339 v1(51.682,25.957)
  Bottom Layer w0.165: v1(51.682,25.957) 51.707,25.982 53.703,25.982 55.794,28.072 55.794,28.87 58.166,31.242 58.156,35.814 58.156,36.09 59.175,37.109 60.8,38.735 R59.2@60.82,38.735
SDRAM_D14: R57.2 U1.T17 | length 23.7
  Top Layer w0.165: U1.T17@52.069,27.139 52.105,27.175 53.428,27.175 v1(53.467,27.136)
  Bottom Layer w0.165: v1(53.467,27.136) 53.476,27.136 54.737,28.396 54.737,29.147 57.458,31.868 57.458,38.167 57.659,38.368 57.791,38.5 57.865,38.574 58.606,39.315 58.606,39.463 58.458,39.611 58.31,39.611 57.769,39.071 57.621,39.071 57.473,39.219 57.473,39.367 58.901,40.795 59.049,40.795 59.197,40.647 59.197,40.499 58.754,40.056 58.754,39.907 58.902,39.759 59.05,39.759 59.81,40.519 59.943,40.652 R57.2@60.82,41.529
SDRAM_D15: R55.2 U1.T16 | length 23.7
  Top Layer w0.165: U1.T16@51.269,27.139 51.283,27.139 51.65,26.772 v1(51.664,26.772)
  Bottom Layer w0.165: v1@51.67,26.765 51.927,27.022 51.986,27.08 51.986,27.229 51.803,27.412 51.803,27.56 51.951,27.708 52.099,27.708 52.689,27.118 52.837,27.118 52.985,27.266 52.985,27.414 52.624,27.775 52.624,27.924 52.772,28.072 52.92,28.072 53.315,27.677 53.463,27.677 53.611,27.825 53.611,27.973 53.319,28.266 53.319,28.414 53.703,28.798 57.109,32.204 57.109,39.482 59.487,41.86 59.744,41.86 R55.2@60.81,42.926
SDRAM_D16: R52.2 U1.T13 | length 21
  Top Layer w0.165: U1.T13@48.869,27.139 48.869,27.099 48.829,27.099 48.47,26.739 48.47,25.591 48.803,25.258 49.116,25.258 v1(49.144,25.23)
  Bottom Layer w0.165: v1(49.144,25.23) 49.151,25.223 54.091,25.223 56.642,27.774 56.642,28.396 58.803,30.557 58.803,33.457 59.611,34.265 59.611,34.683 60.82,35.892 R52.2@60.82,35.941
SDRAM_D17: R51.2 U1.R13 | length 31
  Top Layer w0.165: U1.R13@48.869,27.939 v1(49.269,27.539)
  Bottom Layer w0.165: v1@49.269,27.53 49.278,27.53 49.708,27.1 50.863,27.1 51.835,28.072 52.362,28.072 56.76,32.47 56.76,40.263 56.913,40.416 56.971,40.474 57.119,40.474 57.267,40.326 57.415,40.326 58.559,41.47 58.559,41.618 58.411,41.766 58.263,41.766 57.415,40.918 57.267,40.918 57.119,41.067 57.119,41.215 57.86,41.955 57.86,42.104 57.712,42.252 57.564,42.252 57.119,41.807 56.971,41.807 56.823,41.955 56.823,42.104 57.564,42.844 57.712,42.844 58.156,42.4 58.304,42.4 59.11,43.206 59.259,43.206 59.407,43.058 59.555,43.058 59.613,43.116 R51.2@60.82,44.323
SDRAM_D18: R49.2 U1.P13 | length 23.2
  Top Layer w0.165: U1.P13@48.869,28.739 v1(49.278,29.15)
  Bottom Layer w0.165: v1(49.278,29.15) 49.758,29.63 49.758,31.107 50.6,31.949 52.016,31.949 54.698,34.631 54.698,47.532 55.087,47.921 55.087,48.343 R49.2@55.245,48.501
SDRAM_D19: R47.2 U1.P14 | length 23.8
  Top Layer w0.165: U1.P14@49.669,28.739 49.669,28.746 50.063,29.14 v1@50.063,29.147
  Bottom Layer w0.165: v1(50.096,29.147) 50.331,29.382 50.331,30.882 50.572,31.123 52.574,31.123 55.017,33.566 55.017,45.532 55.017,45.74 55.017,46.73 55.017,46.876 55.548,47.407 R47.2@56.642,48.501
SDRAM_D20: R46.2 U1.R14 | length 24.4
  Top Layer w0.165: U1.R14@49.669,27.939 v1(50.069,27.539)
  Bottom Layer w0.165: v1(50.069,27.539) 51.631,29.101 52.772,29.101 56.412,32.741 56.412,42.108 57.695,43.391 58.562,43.391 60.82,45.649 R46.2@60.82,45.72
SDRAM_D21: R44.2 U1.D16 | length 22.5
  Top Layer w0.165: U1.D16@51.269,36.739 v1(51.669,37.139)
  Bottom Layer w0.165: R44.2@48.26,48.501 49.03,47.731 49.154,47.607 49.212,47.549 49.361,47.549 49.606,47.794 49.755,47.794 49.903,47.646 49.903,47.498 49.458,47.053 49.458,46.905 49.606,46.757 49.754,46.757 50.298,47.301 50.447,47.301 50.595,47.153 50.595,47.005 50.051,46.461 50.051,46.313 50.199,46.165 50.347,46.165 50.891,46.709 51.039,46.709 51.187,46.561 51.187,46.412 50.643,45.868 50.643,45.72 50.791,45.572 50.939,45.572 51.484,46.116 51.632,46.116 51.78,45.968 51.78,45.82 51.236,45.276 51.236,45.128 51.384,44.98 51.532,44.98 52.076,45.524 52.224,45.524 52.372,45.376 52.372,45.227 51.828,44.683 51.828,44.535 51.976,44.387 52.124,44.387 52.175,44.438 52.323,44.438 52.608,44.153 52.666,44.094 52.903,43.858 52.903,38.373 v1(51.669,37.139)
SDRAM_D22: R42.2 U1.B17 | length 16.9
  Top Layer w0.165: U1.B17@52.069,38.339 52.069,38.35 52.474,38.755 v1(52.474,38.765)
  Bottom Layer w0.165: R42.2@46.863,48.501 46.863,48.482 47.406,47.939 47.406,47.935 47.572,47.769 48.184,47.769 51.638,44.315 51.638,44.107 51.638,44.025 51.533,43.92 51.323,43.92 51.219,43.815 51.219,42.42 51.582,42.057 51.73,42.057 51.879,42.205 51.879,42.353 51.638,42.594 51.638,43.396 51.742,43.501 51.952,43.501 52.057,43.396 52.057,42.768 52.471,42.353 52.471,42.205 52.323,42.057 52.323,41.909 52.381,41.85 52.474,41.758 v1(52.474,38.765)
SDRAM_D23: R40.2 U1.B16 | length 14.9
  Top Layer w0.165: U1.B16@51.269,38.339 51.269,38.344 51.686,38.76 v1(51.686,38.765)
  Bottom Layer w0.165: R40.2@45.466,48.501 45.564,48.403 45.564,47.885 46.075,47.374 47.987,47.374 50.546,44.815 50.546,42.016 50.991,41.571 51.806,41.571 52.162,41.215 52.162,39.232 51.695,38.765 v1(51.686,38.765)
SDRAM_D24: R38.2 U1.A16 | length 14.7
  Top Layer w0.165: U1.A16@51.269,39.139 51.273,39.143 51.273,40.081 v1(51.277,40.086)
  Bottom Layer w0.165: R38.2@42.672,48.501 42.75,48.423 42.75,47.887 44.163,46.473 47.098,46.473 49.729,43.842 49.729,41.583 51.226,40.086 v1(51.277,40.086)
SDRAM_D25: R36.2 U1.A15 | length 14.4
  Top Layer w0.165: U1.A15@50.469,39.139 50.469,40.174 v1(51.108,40.813)
  Bottom Layer w0.165: R36.2@44.069,48.501 44.147,48.423 44.147,47.607 44.798,46.956 47.467,46.956 49.03,45.392 49.473,45.392 50.15,44.715 50.15,41.771 v1(51.108,40.813)
SDRAM_D26: R34.2 U1.B15 | length 19.7
  Top Layer w0.165: U1.B15@50.469,38.339 50.469,38.343 50.871,38.745 v1(50.871,38.749)
  Bottom Layer w0.164: 49.234,43.745 49.234,40.386 v1(50.871,38.749)
  Bottom Layer w0.165: R34.2@41.275,48.501 41.373,48.403 41.373,47.636 41.408,47.6 41.467,47.542 41.467,47.394 41.318,47.246 41.318,47.098 42.126,46.29 42.274,46.29 42.422,46.438 42.422,46.587 41.911,47.098 41.911,47.246 42.059,47.394 42.207,47.394 43.015,46.587 43.015,46.438 42.867,46.29 42.867,46.142 42.925,46.084 46.896,46.084 49.234,43.745
SDRAM_D27: R32.2 U1.C14 | length 30.4
  Top Layer w0.165: U1.C14@49.669,37.539 v1(50.077,37.946)
  Bottom Layer w0.165: R32.2@39.878,48.501 39.976,48.403 39.976,47.669 39.976,47.417 40.151,47.241 40.299,47.241 40.448,47.389 40.596,47.389 41.336,46.648 41.336,46.5 41.188,46.352 41.04,46.352 40.596,46.796 40.448,46.796 40.299,46.648 40.299,46.5 41.04,45.759 41.188,45.759 41.336,45.908 41.484,45.908 41.692,45.7 42.36,45.7 46.688,45.7 47.977,44.41 48.036,44.352 48.036,44.203 47.888,44.055 47.888,43.907 47.968,43.827 47.968,39.943 48.073,39.838 48.282,39.838 48.387,39.943 48.387,43.659 48.492,43.763 48.701,43.763 48.806,43.659 48.806,39.524 48.701,39.419 48.492,39.419 48.387,39.314 48.387,39.232 48.387,38.72 48.759,38.348 49.686,38.348 50.077,37.958 v1(50.077,37.946)
SDRAM_D28: R30.2 U1.A2 | length 26.4
  Top Layer w0.165: v1(39.948,40.313) 39.93,40.296 39.93,39.332 40.069,39.193 U1.A2@40.069,39.139
  Bottom Layer w0.165: R30.2@38.481,48.501 38.575,48.407 38.575,47.708 38.575,47.626 38.47,47.521 37.842,47.521 37.737,47.416 37.737,45.718 37.842,45.613 38.051,45.613 38.156,45.718 38.156,46.997 38.261,47.102 38.889,47.102 38.994,47.207 38.994,47.521 39.099,47.626 39.308,47.626 39.413,47.521 39.413,46.788 39.308,46.683 38.68,46.683 38.575,46.578 38.575,45.52 38.575,45.323 38.47,45.218 37.885,45.218 37.78,45.113 37.78,44.904 37.885,44.799 38.875,44.799 38.98,44.694 38.98,44.485 38.875,44.38 37.885,44.38 37.78,44.275 37.78,44.066 37.885,43.961 38.837,43.961 38.941,43.856 38.941,43.647 38.837,43.542 37.885,43.542 37.78,43.437 37.78,43.228 37.885,43.123 38.837,43.123 38.941,43.018 38.941,42.809 38.837,42.704 38.282,42.704 38.177,42.599 38.177,42.39 38.282,42.285 38.837,42.285 38.941,42.18 38.941,41.971 38.837,41.866 38.402,41.866 38.297,41.761 38.297,41.552 38.402,41.447 39.229,41.447 39.334,41.342 39.334,41.133 39.229,41.028 38.805,41.028 38.7,40.923 38.7,40.714 38.805,40.609 39.653,40.609 39.735,40.526 39.837,40.425 v1(39.948,40.313)
SDRAM_D29: R28.2 U1.B3 | length 20.5
  Top Layer w0.165: v1(40.448,39.502) 40.462,39.488 40.462,38.746 U1.B3@40.869,38.339
  Bottom Layer w0.165: R28.2@37.084,48.501 37.055,48.472 37.055,47.752 37.055,47.669 36.95,47.565 36.43,47.565 36.325,47.46 36.325,45.719 36.43,45.614 36.639,45.614 36.744,45.719 36.744,47.041 36.849,47.146 37.058,47.146 37.163,47.041 37.163,45.803 37.163,45.787 37.268,45.682 37.327,45.624 ; 37.325,45.622 37.325,45.327 37.221,45.222 36.794,45.222 36.69,45.118 36.69,44.908 36.794,44.803 37.403,44.803 37.508,44.699 37.508,44.489 37.403,44.384 36.794,44.384 36.69,44.28 36.69,44.07 36.794,43.965 37.403,43.965 37.508,43.861 37.508,43.651 37.403,43.546 36.794,43.546 36.69,43.442 36.69,43.232 36.794,43.127 37.221,43.127 37.325,43.023 37.325,42.94 37.325,42.431 37.804,41.952 37.804,40.846 39.149,39.502 v1(40.448,39.502)
SDRAM_D30: R26.2 U1.E2 | length 18.3
  Top Layer w0.165: U1.E2@40.069,35.939 40.091,35.939 40.497,36.345 v1(40.52,36.345)
  Bottom Layer w0.165: R26.2@34.29,48.501 34.29,46.41 34.695,46.005 34.695,44.854 35.894,43.655 35.894,41.104 38.43,38.567 41.326,38.567 41.65,38.243 41.65,36.962 41.434,36.746 40.927,36.746 40.525,36.345 v1(40.52,36.345)
SDRAM_D31: R24.2 U1.F3 | length 25.4
  Top Layer w0.165: U1.F3@40.869,35.139 40.876,35.139 41.262,35.525 v1(41.269,35.525)
  Bottom Layer w0.165: R24.2@35.687,48.501 35.511,48.325 35.511,47.752 35.511,47.669 35.615,47.565 35.825,47.565 35.93,47.46 35.93,45.475 35.825,45.37 35.615,45.37 35.511,45.475 35.511,47.041 35.406,47.146 35.196,47.146 35.092,47.041 35.092,45.128 35.567,44.653 35.715,44.653 35.863,44.801 36.011,44.801 36.069,44.743 36.4,44.413 36.4,42.515 37.294,41.62 37.294,40.614 38.856,39.052 40.981,39.052 41.064,39.052 41.168,39.157 41.168,39.594 41.273,39.699 41.483,39.699 41.587,39.594 41.587,38.82 41.692,38.715 41.902,38.715 42.006,38.82 42.006,38.832 42.111,38.937 42.259,38.937 42.439,38.757 42.465,38.731 42.465,36.721 v1(41.269,35.525)
SDRAM_NBL0: R71.1 U1.C4 | length 14.2
  Top Layer w0.165: v1(41.242,37.17) 41.271,37.17 41.64,37.539 U1.C4@41.669,37.539
  Bottom Layer w0.165: R71.1@32.898,45.712 33.674,44.936 33.674,44.338 34.884,43.128 34.884,40.758 38.503,37.139 41.211,37.139 v1(41.242,37.17)
SDRAM_NBL1: R69.1 U1.B4 | length 14.8
  Top Layer w0.165: v1(41.242,37.982) 41.277,37.982 41.634,38.339 U1.B4@41.669,38.339
  Bottom Layer w0.165: R69.1@32.906,47.117 32.906,46.998 34.137,45.767 34.137,44.602 35.335,43.404 35.335,41.01 38.364,37.982 v1(41.242,37.982)
SDRAM_NBL2: R67.1 U1.A4 | length 3.6
  Top Layer w0.165: U1.A4@41.669,39.139 41.672,39.142 41.672,40.103 v1(41.675,40.106)
  Bottom Layer w0.165: R67.1@41.021,42.405 41.021,42.213 41.021,41.429 41.702,40.749 41.702,40.133 v1(41.675,40.106)
SDRAM_NBL3: R65.1 U1.A3 | length 3.8
  Top Layer w0.165: v1(40.848,40.225) 40.859,40.214 40.859,39.149 U1.A3@40.869,39.139
  Bottom Layer w0.165: R65.1@39.624,42.405 39.624,41.821 39.624,41.393 40.792,40.225 v1(40.848,40.225)
SDRAM_R_A0: R45.2 U2.G8 | length 52.1
  Top Layer w0.14: v1(44.38,62.817) 44.38,62.798 44.757,62.421 U2.G8@44.757,62.401
  L4_SIG w0.13: v1(25.489,45.053) 25.501,45.065 25.501,49.128 30.842,54.469 30.888,54.515 31.024,54.515 31.431,54.107 31.567,54.107 32.154,54.694 32.154,54.83 32.018,54.966 31.882,54.966 31.567,54.65 31.431,54.65 31.296,54.786 31.296,54.922 31.904,55.53 32.939,55.53 37.291,59.882 37.291,60.018 37.155,60.154 37.019,60.154 32.78,55.914 32.594,55.914 32.498,56.01 32.498,56.202 32.594,56.298 32.62,56.298 37.019,60.697 37.155,60.697 37.562,60.289 37.698,60.289 37.744,60.335 37.744,61.392 39.154,62.802 44.365,62.802 v1(44.38,62.817)
  Bottom Layer w0.165: v1(25.489,45.053) 25.534,45.053 26.257,44.329 31.35,44.329 R45.2@31.356,44.323
SDRAM_R_A1: R43.2 U2.G9 | length 54.5
  Top Layer w0.14: U2.G9@44.757,63.201 44.757,63.5
  Top Layer w0.165: 44.757,63.5 v1(44.757,64.074)
  L4_SIG w0.13: v1(23.975,45.295) 23.99,45.31 23.99,49.449 32.126,57.585 32.172,57.631 32.172,57.767 31.765,58.174 31.765,58.31 33.701,60.246 33.837,60.246 33.973,60.111 33.973,59.975 32.308,58.31 32.308,58.174 32.444,58.038 32.579,58.038 34.244,59.703 34.358,59.817 34.365,59.824 34.365,60.697 35.06,61.392 35.88,61.392 36.238,61.75 36.284,61.796 36.284,61.932 35.877,62.339 35.877,62.475 38.11,64.708 38.246,64.708 38.381,64.572 38.381,64.436 36.42,62.475 36.42,62.339 36.556,62.203 36.692,62.203 38.764,64.276 38.878,64.389 39.004,64.516 44.315,64.516 v1(44.757,64.074)
  Bottom Layer w0.165: v1(23.975,45.295) 26.304,42.965 31.317,42.965 R43.2@31.356,42.926
SDRAM_R_A2: R41.2 U2.F7 | length 57
  Top Layer w0.14: v1(43.546,61.225) 43.563,61.225 43.94,61.601 U2.F7@43.957,61.601
  L4_SIG w0.13: v1(26.035,41.529) 26.005,41.559 26.005,48.023 26.392,48.41 26.438,48.456 26.438,48.591 26.031,48.999 26.031,49.135 30.918,54.022 31.054,54.022 31.19,53.886 31.19,53.75 26.574,49.135 26.574,48.999 26.71,48.863 26.846,48.863 31.461,53.479 31.575,53.593 39.232,61.25 39.56,61.25 39.625,61.25 39.721,61.346 39.721,61.922 39.817,62.018 42.883,62.018 42.979,61.922 42.979,61.73 42.883,61.634 40.201,61.634 40.105,61.538 40.105,61.346 40.201,61.25 43.044,61.25 43.521,61.25 v1(43.546,61.225)
  Bottom Layer w0.165: v1(26.035,41.529) R41.2@31.356,41.529
SDRAM_R_A3: R39.2 U2.F3 | length 54.4
  Top Layer w0.14: v1(43.59,58.843) 43.59,58.806 43.957,58.439 U2.F3@43.957,58.401
  L4_SIG w0.13: v1(28.644,40.137) 28.644,40.401 28.644,40.466 28.74,40.562 29.316,40.562 29.412,40.658 29.412,41.234 29.508,41.33 30.084,41.33 30.18,41.426 30.18,44.26 30.084,44.356 29.892,44.356 29.796,44.26 29.796,41.81 29.7,41.714 29.508,41.714 29.412,41.81 29.412,48.006 29.859,48.453 29.859,48.589 29.724,48.725 29.588,48.725 29.028,48.165 29.028,41.042 28.932,40.946 28.74,40.946 28.644,41.042 28.644,48.324 29.45,49.13 29.564,49.244 39.162,58.842 43.588,58.842 v1(43.59,58.843)
  Bottom Layer w0.165: v1(28.644,40.137) 31.351,40.137 R39.2@31.356,40.132
SDRAM_R_A4: R37.2 U2.G1 | length 54.2
  Top Layer w0.14: v1@44.456,56.501 U2.G1@44.757,56.801
  Top Layer w0.164: v1(44.356,56.402) v1(44.356,56.402) v1@44.456,56.501
  L4_SIG w0.13: v1(29.531,38.787) 30.276,38.787 30.341,38.787 30.437,38.691 30.437,38.499 30.533,38.403 32.721,38.403 33.404,39.086 33.404,39.417 33.308,39.513 33.116,39.513 33.02,39.417 33.02,39.245 32.562,38.787 31.569,38.787 31.473,38.883 31.473,39.075 31.569,39.171 32.403,39.171 32.636,39.404 32.636,39.801 32.732,39.897 32.924,39.897 33.02,39.993 33.02,40.058 33.02,46.101 32.236,46.885 32.236,49.11 38.646,55.52 38.984,55.52 39.08,55.52 39.176,55.616 39.176,56.563 39.272,56.659 39.464,56.659 39.56,56.563 39.56,55.52 39.56,54.678 39.656,54.582 39.848,54.582 39.944,54.678 39.944,55.52 39.944,56.703 40.04,56.799 40.232,56.799 40.328,56.703 40.328,55.52 40.328,54.678 40.424,54.582 40.616,54.582 40.712,54.678 40.712,55.52 40.712,56.696 40.808,56.792 41,56.792 41.096,56.696 41.096,55.52 41.096,54.678 41.192,54.582 41.384,54.582 41.48,54.678 41.48,55.52 41.48,55.966 41.576,56.062 41.768,56.062 41.864,55.966 41.864,55.52 41.864,54.678 41.96,54.582 42.152,54.582 42.248,54.678 42.248,55.52 42.248,55.968 42.344,56.064 42.536,56.064 42.632,55.968 42.632,55.52 42.632,54.678 42.728,54.582 42.92,54.582 43.016,54.678 43.016,55.424 43.112,55.52 43.384,55.52 43.474,55.52 v1(44.356,56.402)
  Bottom Layer w0.165: v1(29.531,38.787) 31.304,38.787 R37.2@31.356,38.735